# EAGLE board SparkFun RTK Facet - Main (EAGLE 9.6.2)
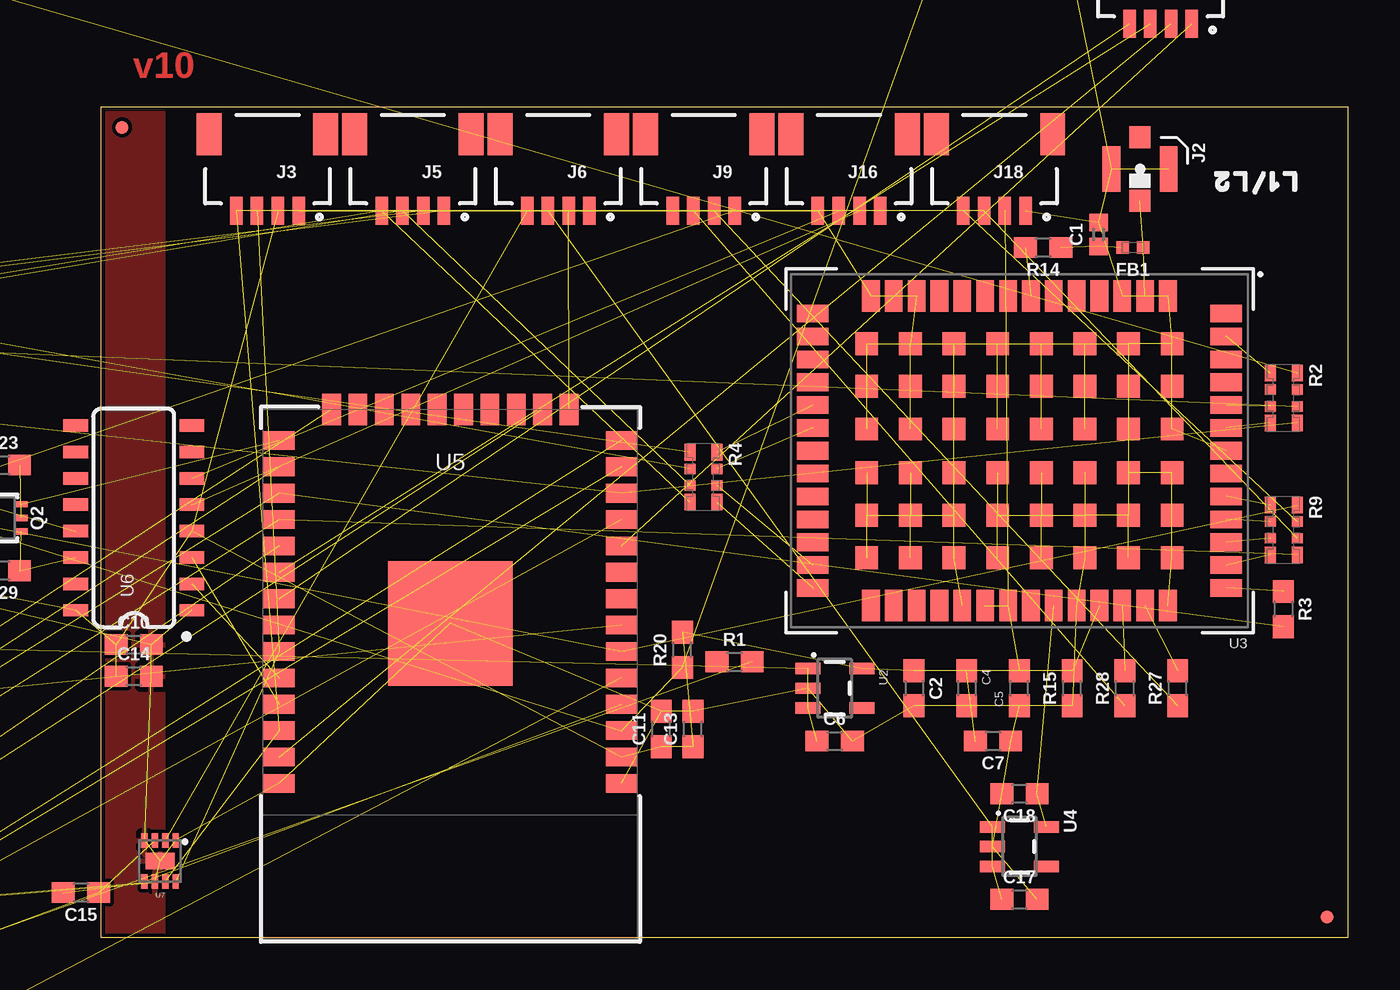
[diagram p0: board, top side]
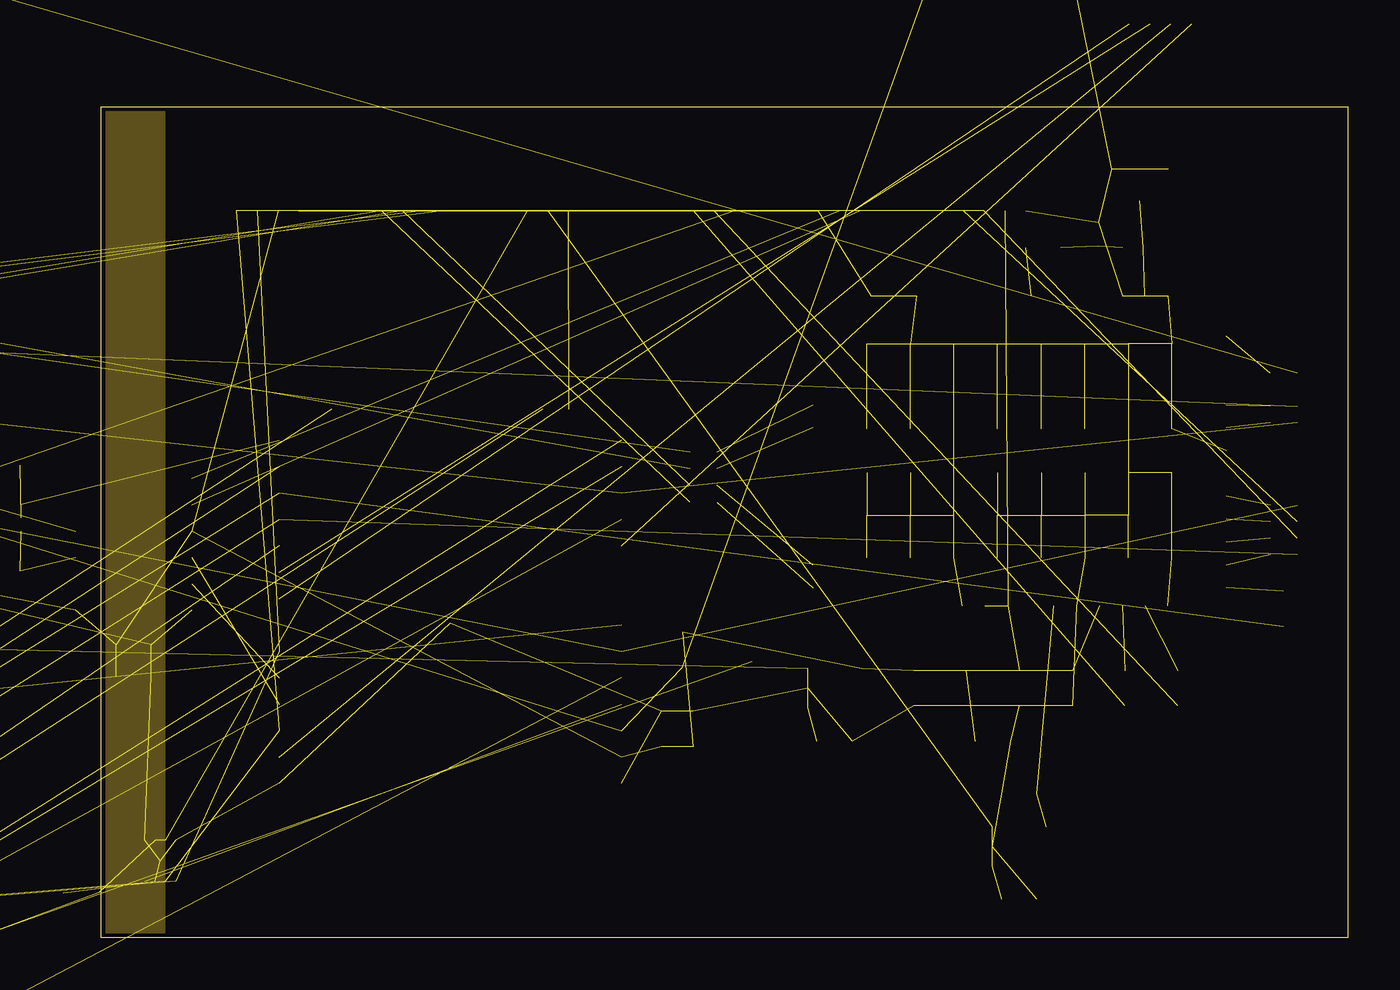
[diagram p1: board, inner layer Horz/GND]
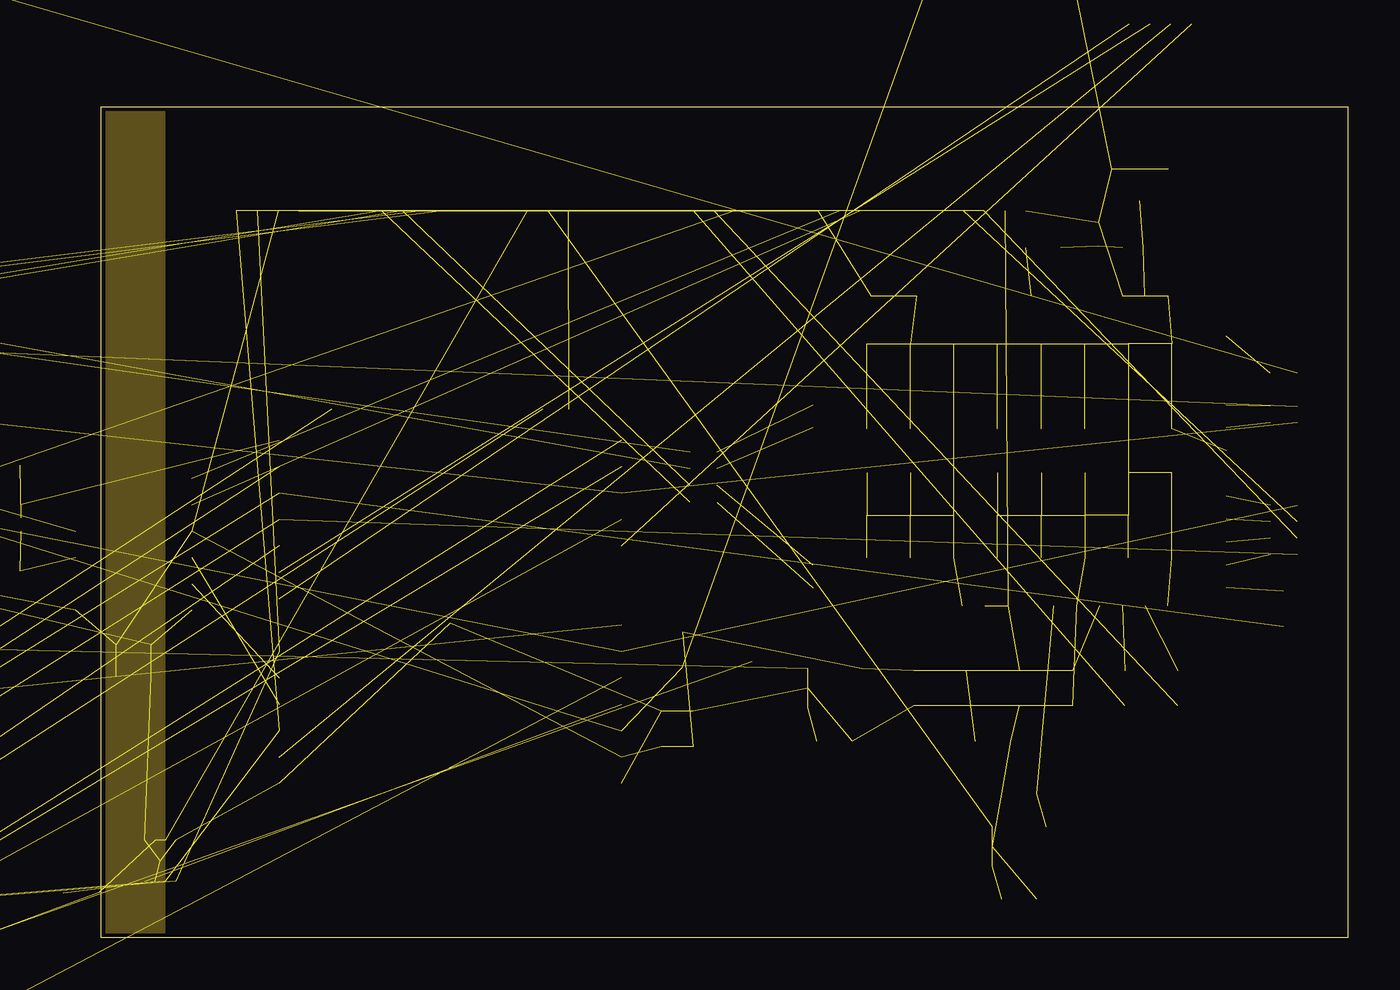
[diagram p2: board, inner layer Vert]
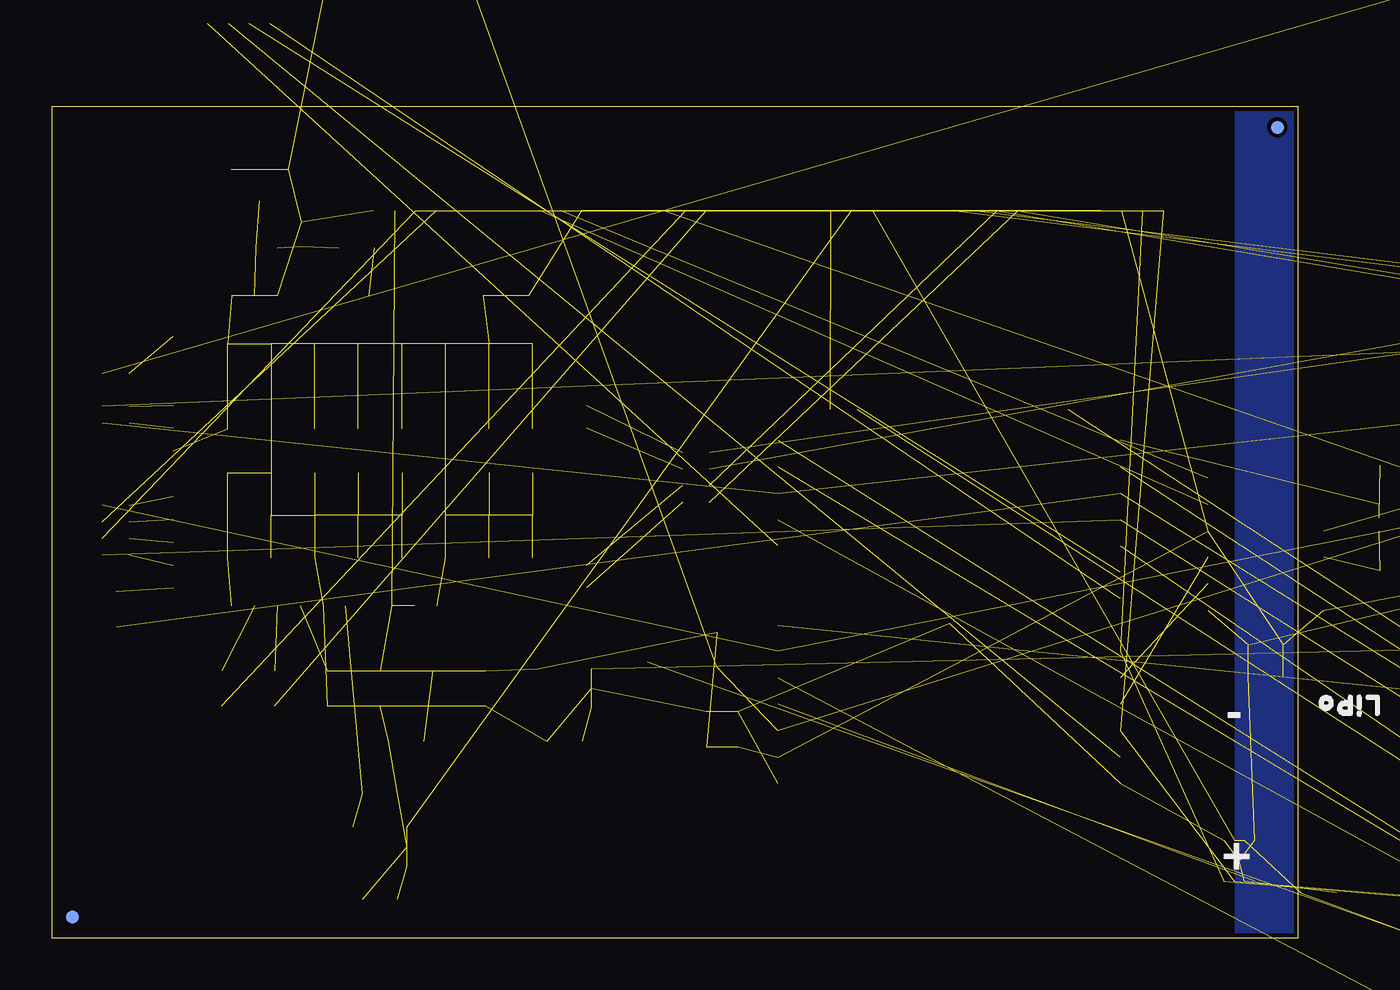
[diagram p3: board, bottom side, seen from below]

Size 60 x 40 mm. Coordinates in mm from the lower left corner, seen from the top.
Outline: 0,40 60,40 60,0 0,0 0,40
Copper layers (1*2*15*16): Top 0.035559375mm / dielectric 0.47751875mm / Horz/GND 0.035559375mm / dielectric 0.47751875mm / Vert 0.035559375mm / dielectric 0.47751875mm / Bottom 0.035559375mm
Design rules "SparkFun-4-layer-TIGHT *": minimum track width 7mil, minimum drill 12mil, track to track 7mil, track to pad 7mil, pad to pad 7mil, via to via 7mil, smd to smd 7mil, copper to edge 7mil, drill to drill 7mil, minimum pad ring 7mil, minimum via ring 7mil, stop-mask expansion 4mil, vias tented up to drill 25mil, thermal gap 10mil
Net classes: 1 power: width 0.305 mm; 2 3.3V: width 0.559 mm; 3 RF: width 0.35 mm, clearance 0.203 mm
tKeepout: area 0,0 to 2,40; area 58,0 to 60,40
bKeepout: area 0,0 to 2,40; area 58,0 to 60,40

## Footprints (pad centres in the part's own frame; a part is rotated, then mirrored left to right if it is on the bottom)
0402 = smd 0.85 x 0.9: 1 -0.58,0; 2 0.58,0
0603 = smd 1.1 x 1: 1 -0.85,0; 2 0.85,0
LED-0603 = smd 1 x 1: A -0.877,0; C 0.877,0
SOD-323 = smd 0.63 x 0.83: A 1.15,0; C -1.15,0
0402-TIGHT = smd 0.6 x 0.6: 1 -0.5,0; 2 0.5,0
1X04_NO_SILK = drill 1.016 pad 1.88: 1 0,0; 2 2.54,0; 3 5.08,0; 4 7.62,0
U.FL = smd 2.2 x 0.85: 1 0,1.375; 2 0,-1.375 | smd 1.05 x 1: FEED 1.525,0; NC -1.525,0
JST04_1MM_RA = smd 0.6 x 1.35: 1 -1.5,0; 2 -0.5,0; 3 0.5,0; 4 1.5,0 | smd 1.2 x 2: NC1 2.8,-3.675; NC2 -2.8,-3.675
JST-2-SMD = smd 1 x 4.6: 1 -1,-3.7; 2 1,-3.7 | smd 1.6 x 3.4: NC1 -3.4,1.5; NC2 3.4,1.5
1X02_NO_SILK = drill 1.016 pad 1.88: 1 0,0; 2 2.54,0
JST-3-SMD = smd 1 x 4.6: 1 2.01,-4.77; 2 0.01,-4.77; 3 -1.99,-4.77 | smd 1.6 x 3.4: NC1 -4.39,0.43; NC2 4.41,0.43
SMT-JUMPER_3_2-NC_TRACE_SILK = smd 0.66 x 1.27: 1 -1.041,0; 2 0,0; 3 1.041,0
FIDUCIAL-MICRO = smd 0.635 x 0.635: 1 0,0
COMBO-JUMPER_2_NC_TRACE = smd 0.635 x 1.27: 1 -0.508,0; 2 0.508,0 | drill 1.016 pad 1.88: 3 -1.27,0; 4 1.27,0
SOT23-3 = smd 0.8 x 0.9: 1 -0.95,-1; 2 0.95,-1; 3 0,1.1
SC70-6 = smd 0.3 x 0.66: 1 -0.65,-0.92; 2 0,-0.92; 3 0.65,-0.92; 4 0.65,0.92; 5 0,0.92; 6 -0.65,0.92
1206_RA = smd 0.8 x 0.55: P1 -1.2,-0.62; P4 1.2,-0.62; P5 1.2,0.68; P8 -1.2,0.68 | smd 0.5 x 0.55: P2 -0.4,-0.62; P3 0.4,-0.62; P6 0.4,0.68; P7 -0.4,0.68
SO16 = smd 0.6 x 1.2: 1 -4.445,-2.8; 2 -3.175,-2.8; 3 -1.905,-2.8; 4 -0.635,-2.8; 5 0.635,-2.8; 6 1.905,-2.8; 7 3.175,-2.8; 8 4.445,-2.8; 9 4.445,2.8; 10 3.175,2.8; 11 1.905,2.8; 12 0.635,2.8; 13 -0.635,2.8; 14 -1.905,2.8; 15 -3.175,2.8; 16 -4.445,2.8
SOT23-5 = smd 0.55 x 1.2: 1 -0.95,-1.3; 2 0,-1.3; 3 0.95,-1.3; 4 0.95,1.3; 5 -0.95,1.3
ZED-F9P = smd 0.85 x 1.52: 1 -7.15,-7.45; 2 -6.05,-7.45; 3 -4.95,-7.45; 4 -3.85,-7.45; 5 -2.75,-7.45; 6 -1.65,-7.45; 7 -0.55,-7.45; 8 0.55,-7.45; 9 1.65,-7.45; 10 2.75,-7.45; 11 3.85,-7.45; 12 4.95,-7.45; 13 6.05,-7.45; 14 7.15,-7.45; 28 7.15,7.45; 29 6.05,7.45; 30 4.95,7.45; 31 3.85,7.45; 32 2.75,7.45; 33 1.65,7.45; 34 0.55,7.45; 35 -0.55,7.45; 36 -1.65,7.45; 37 -2.75,7.45; 38 -3.85,7.45; 39 -4.95,7.45; 40 -6.05,7.45; 41 -7.15,7.45 | smd 1.52 x 0.85: 15 9.95,-6.6; 16 9.95,-5.5; 17 9.95,-4.4; 18 9.95,-3.3; 19 9.95,-2.2; 20 9.95,-1.1; 21 9.95,0; 22 9.95,1.1; 23 9.95,2.2; 24 9.95,3.3; 25 9.95,4.4; 26 9.95,5.5; 27 9.95,6.6; 42 -9.95,6.6; 43 -9.95,5.5; 44 -9.95,4.4; 45 -9.95,3.3; 46 -9.95,2.2; 47 -9.95,1.1; 48 -9.95,0; 49 -9.95,-1.1; 50 -9.95,-2.2; 51 -9.95,-3.3; 52 -9.95,-4.4; 53 -9.95,-5.5; 54 -9.95,-6.6 | smd 1.1 x 1.1: 55 -1.05,-1.05; 56 -3.15,-1.05; 57 -5.25,-1.05; 58 -7.35,-1.05; 59 -1.05,-3.1; 60 -3.15,-3.1; 61 -5.25,-3.1; 62 -7.35,-3.1; 63 -1.05,-5.15; 64 -3.15,-5.15; 65 -5.25,-5.15; 66 -7.35,-5.15; 67 -1.05,5.15; 68 -3.15,5.15; 69 -5.25,5.15; 70 -7.35,5.15; 71 -1.05,3.1; 72 -3.15,3.1; 73 -5.25,3.1; 74 -7.35,3.1; 75 -1.05,1.05; 76 -3.15,1.05; 77 -5.25,1.05; 78 -7.35,1.05; 79 1.05,1.05; 80 3.15,1.05; 81 5.25,1.05; 82 7.35,1.05; 83 1.05,3.1; 84 3.15,3.1; 85 5.25,3.1; 86 7.35,3.1; 87 1.05,5.15; 88 3.15,5.15; 89 5.25,5.15; 90 7.35,5.15; 91 1.05,-5.15; 92 3.15,-5.15; 93 5.25,-5.15; 94 7.35,-5.15; 95 1.05,-3.1; 96 3.15,-3.1; 97 5.25,-3.1; 98 7.35,-3.1; 99 1.05,-1.05; 100 3.15,-1.05; 101 5.25,-1.05; 102 7.35,-1.05
ESP-WROOM-32-NARROW = smd 0.9 x 1.5: 1 6.43,8.238; 2 5.16,8.238; 3 3.89,8.238; 4 2.62,8.238; 5 1.35,8.238; 6 0.08,8.238; 7 -1.19,8.238; 8 -2.46,8.238; 9 -3.73,8.238; 10 -5,8.238; 11 -6.27,8.238; 12 -7.54,8.238; 13 -8.81,8.238; 14 -10.08,8.238; 25 -10.08,-8.238; 26 -8.81,-8.238; 27 -7.54,-8.238; 28 -6.27,-8.238; 29 -5,-8.238; 30 -3.73,-8.238; 31 -2.46,-8.238; 32 -1.19,-8.238; 33 0.08,-8.238; 34 1.35,-8.238; 35 2.62,-8.238; 36 3.89,-8.238; 37 5.16,-8.238; 38 6.43,-8.238 | smd 1.5 x 0.9: 15 -11.57,5.715; 16 -11.57,4.445; 17 -11.57,3.175; 18 -11.57,1.905; 19 -11.57,0.635; 20 -11.57,-0.635; 21 -11.57,-1.905; 22 -11.57,-3.175; 23 -11.57,-4.445; 24 -11.57,-5.715 | smd 6 x 6: GND -1.27,0
SO016 = smd 0.6 x 1.2: 1 -4.445,-2.8; 2 -3.175,-2.8; 3 -1.905,-2.8; 4 -0.635,-2.8; 5 0.635,-2.8; 6 1.905,-2.8; 7 3.175,-2.8; 8 4.445,-2.8; 9 4.445,2.8; 10 3.175,2.8; 11 1.905,2.8; 12 0.635,2.8; 13 -0.635,2.8; 14 -1.905,2.8; 15 -3.175,2.8; 16 -4.445,2.8
DFN-8 = smd 0.3 x 0.7: 1 -0.75,-0.99; 2 -0.25,-0.99; 3 0.25,-0.99; 4 0.75,-0.99; 5 0.75,0.99; 6 0.25,0.99; 7 -0.25,0.99; 8 -0.75,0.99 | smd 1.38 x 0.8: 9 0,0
DFN-10 = smd 0.8 x 0.35: 1 -1.45,1; 2 -1.45,0.5; 3 -1.45,0; 4 -1.45,-0.5; 5 -1.45,-1; 6 1.45,-1; 7 1.45,-0.5; 8 1.45,0; 9 1.45,0.5; 10 1.45,1 | smd 1.7 x 2.5: 11 0,0

## Placement (x,y rotation side)
C1  47pF  [0402]  48.01,33.85 90 top
C2  1.0uF  [0603]  39.12,12.01 270 top
C3  4.7uF  [0603]  -119.38,-49.53 0 top  (outside the outline)
C4  1.0uF  [0603]  41.66,12.01 270 top
C5  0.1uF  [0603]  44.2,12.01 90 top
C6  1.0uF  [0603]  35.31,9.47 0 top
C7  0.1uF  [0603]  42.93,9.47 180 top
C10  10uF  [0603]  1.56,14.11 0 top
C11  0.1uF  [0603]  26.96,10.05 90 top
C12  0.1uF  [0603]  44.5,58.14 270 bottom  (outside the outline)
C13  0.1uF  [0603]  28.48,10.05 90 top
C14  10uF  [0603]  1.56,12.59 0 top
C15  0.1uF  [0603]  -0.98,2.18 180 top
C16  4.7uF  [0603]  -115.57,-49.53 0 top  (outside the outline)
C17  1.0uF  [0603]  44.2,1.85 0 top
C18  1.0uF  [0603]  44.2,6.93 180 top
D1  Yellow  [LED-0603]  -70.61,62.87 0 top  (outside the outline)
D2  3A/10V/280mV  [SOD-323]  -111.76,-13.97 0 top  (outside the outline)
D3  3A/10V/280mV  [SOD-323]  -125.73,-49.53 0 top  (outside the outline)
FB1  2.66Ω  [0402-TIGHT]  49.66,33.22 180 top
FRAME2  FRAME-LEDGER  [CREATIVE_COMMONS]  82.55,6.35 0 top  (outside the outline)
J1  [1X04_NO_SILK]  -57.15,33.02 90 top  (outside the outline)
J2  U.FL  [U.FL]  50,37 270 top
J3  Qwiic  [JST04_1MM_RA]  8,35 180 top
J4  Qwiic Right Angle  [JST04_1MM_RA]  -81.2,-4.3 0 bottom  (outside the outline)
J5  [JST04_1MM_RA]  15,35 180 top
J6  [JST04_1MM_RA]  22,35 180 top
J7  [JST-2-SMD]  -124.46,-31.75 0 top  (outside the outline)
J8  [1X04_NO_SILK]  -127,-68.58 0 top  (outside the outline)
J9  [JST04_1MM_RA]  29,35 180 top
J11  [1X04_NO_SILK]  -95.25,16.14 180 top  (outside the outline)
J12  [1X04_NO_SILK]  -49.53,26.4 180 top  (outside the outline)
J13  [1X04_NO_SILK]  -91.44,29.21 90 top  (outside the outline)
J14  [1X02_NO_SILK]  60.3,60.99 270 top  (outside the outline)
J16  [JST04_1MM_RA]  36,35 180 top
J17  3-PIN SMD  [JST-3-SMD]  -113.03,-10.16 0 top  (outside the outline)
J18  QWIIC_RIGHT_ANGLE  [JST04_1MM_RA]  43,35 180 top
J19  [JST04_1MM_RA]  51,44 180 top  (outside the outline)
J20  [1X02_NO_SILK]  -115.57,-40.64 0 top  (outside the outline)
JP7  JUMPER-SMT_3_2-NC_TRACE_SILK  [SMT-JUMPER_3_2-NC_TRACE_SILK]  -120.65,-72.39 0 top  (outside the outline)
JP21  FIDUCIALUFIDUCIAL  [FIDUCIAL-MICRO]  59,1 0 top
JP61  FIDUCIALUFIDUCIAL  [FIDUCIAL-MICRO]  1,39 0 top
JP71  FIDUCIALUFIDUCIAL  [FIDUCIAL-MICRO]  59,1 0 bottom
JP81  FIDUCIALUFIDUCIAL  [FIDUCIAL-MICRO]  1,39 0 bottom
LOGO1  OSHW-LOGOMINI  [OSHW-LOGO-MINI]  -107.95,83.82 0 bottom  (outside the outline)
LOGO2  SFE_LOGO_NAME_FLAME.1_INCH  [SFE_LOGO_NAME_FLAME_.1]  -123.8,65.02 0 top  (outside the outline)
LOGO3  SFE_LOGO_NAME_FLAME.1_INCH  [SFE_LOGO_NAME_FLAME_.1]  25,87.69 0 top  (outside the outline)
MEAS2  [COMBO-JUMPER_2_NC_TRACE]  -127,-57.15 0 top  (outside the outline)
Q1  600mA/40V  [SOT23-3]  -111.76,0 0 top  (outside the outline)
Q2  MBT3904DW1T1  [SC70-6]  -4.79,20.21 270 top  (outside the outline)
R1  1k  [0603]  30.48,13.28 0 top
R2  33  [1206_RA]  56.9,25.98 270 top
R3  33  [0603]  56.9,15.82 270 top
R4  33  [1206_RA]  28.96,22.17 270 top
R5  10k  [0603]  -111.76,-5.08 0 top  (outside the outline)
R6  1k  [0603]  -127,-53.34 0 top  (outside the outline)
R7  2.2k  [0603]  -127,-76.2 0 top  (outside the outline)
R8  0  [0603]  -123.19,-53.34 0 top  (outside the outline)
R9  33  [1206_RA]  56.9,19.63 270 top
R10  10k  [0603]  -119.38,-53.34 0 top  (outside the outline)
R11  330  [0603]  -70.61,64.14 0 top  (outside the outline)
R12  2.2k  [0603]  -123.19,-76.2 0 top  (outside the outline)
R14  10  [0603]  45.34,33.22 180 top
R15  100k  [0603]  46.74,12.01 90 top
R18  1k  [0603]  -113.03,-17.78 0 top  (outside the outline)
R20  10k  [0603]  27.98,13.86 90 top
R23  10k  [0603]  -4.79,22.75 0 top  (outside the outline)
R27  27  [0603]  51.82,12.01 90 top
R28  27  [0603]  49.28,12.01 90 top
R29  10k  [0603]  -4.79,17.67 180 top  (outside the outline)
R30  150k  [0603]  -115.57,-53.34 0 top  (outside the outline)
U1  74HC4052D  [SO16]  -121.92,-62.23 0 top  (outside the outline)
U2  3.3V  [SOT23-5]  35.31,12.01 270 top
U3  U-BLOX_ZED-F9P  [ZED-F9P]  44.2,23.44 180 top
U4  3.3V  [SOT23-5]  44.2,4.39 270 top
U5  ESP-WROOM-32NARROW  [ESP-WROOM-32-NARROW]  16.8,13.86 270 top
U6  CH340C  [SO016]  1.56,20.21 90 top
U7  MAX17048  [DFN-8]  2.83,3.7 180 top
U10  MCP73833  [DFN-10]  -125.73,-43.18 0 top  (outside the outline)
U$1  [#GND#0]  -56.52,33.02 0 top  (outside the outline)
U$2  SPECIAL_INSTRUCTIONS-ORDERING  [ORDERING_INSTRUCTIONS]  63.5,81.28 0 top  (outside the outline)
U$5  [#3V3#0]  -57.15,26.81 90 top  (outside the outline)
U$6  [ANTENNA0]  -91.44,19.67 0 top  (outside the outline)
U$10  [#RTK#1]  -56.64,38.1 0 top  (outside the outline)
U$11  [#PPS#0]  -91.95,29.21 0 bottom  (outside the outline)
U$14  [#RX#2]  -107.95,40.13 270 bottom  (outside the outline)
U$16  [ZED0]  -106.17,39.75 90 bottom  (outside the outline)
U$17  [##SAFE##5]  -91.95,31.75 0 bottom  (outside the outline)
U$18  [ACTIVE0]  -90.81,21.07 0 top  (outside the outline)
U$19  [L1#L21]  58.3,36.41 180 top
U$23  [#3#5#5V#0]  -102.87,16.65 90 top  (outside the outline)
U$27  [LIPO0]  -4.66,11.19 180 bottom  (outside the outline)
U$28  [##RST##4]  -91.95,34.29 0 bottom  (outside the outline)
U$30  [QWIIC_4MM]  -81.2,-2.4 0 bottom  (outside the outline)
U$32  [#FENCE#3]  -56.64,35.56 0 top  (outside the outline)
U$33  [#INT#0]  -91.95,36.83 0 bottom  (outside the outline)
U$37  [#3V3#0]  -56.64,40.64 0 top  (outside the outline)
U$38  [#GND#0]  -95.25,16.65 90 top  (outside the outline)
U$39  [#RX2#2]  -97.79,16.65 90 top  (outside the outline)
U$40  [#TX2#1]  -100.33,16.65 90 top  (outside the outline)
U$41  [BLUETOOTH2]  -103.76,23.5 90 top  (outside the outline)
U$51  [BROADCAST3]  -102.23,23.5 90 top  (outside the outline)
U$52  [NMEA1]  -100.58,32.26 0 top  (outside the outline)
U$53  [RTCM0]  -100.58,23.5 0 top  (outside the outline)
U$56  [POWER0]  -53.31,68.88 0 top  (outside the outline)
U$57  [SWITCH1]  -50.13,67.61 0 top  (outside the outline)
U$58  [BLUEOOTH3]  -101.85,45.47 0 top  (outside the outline)
U$59  [CNTR1]  -98.42,36.07 0 top  (outside the outline)
U$60  [#ESP_RST#0]  59.74,60.93 0 bottom  (outside the outline)
U$61  [EXT0]  -101.98,36.07 0 top  (outside the outline)
U$62  [NMEA2]  -103.5,39.75 90 top  (outside the outline)
U$63  [SERIAL10]  -105.16,39.24 90 top  (outside the outline)
U$64  [CONNECTION1]  -102.11,36.2 90 top  (outside the outline)
U$65  [#TX1#1]  -54.61,26.81 90 top  (outside the outline)
U$68  [#RX1#2]  -52.07,26.81 90 top  (outside the outline)
U$72  [#TX#1]  -107.95,47.24 270 bottom  (outside the outline)
U$73  [#DUAL#0]  -102.87,46.86 270 bottom  (outside the outline)
U$82  [#GND#0]  -49.53,26.81 90 top  (outside the outline)
U$84  [#GND#1]  59.74,58.39 0 bottom  (outside the outline)

## Library data of the parts
C1 = SparkFun-Capacitors; PROD_ID: CAP-15063
C2 C4 C6 C17 C18 = SparkFun-Capacitors; PROD_ID: CAP-13930
C3 C16 = SparkFun-Capacitors; PROD_ID: CAP-14106
C5 C7 = SparkFun-Capacitors; PROD_ID: CAP-08604
C10 C14 = SparkFun-Capacitors; PROD_ID: CAP-11015
C11-C13 C15 = SparkFun-Capacitors; PROD_ID: CAP-00810
D1 = SparkFun-LED; PROD_ID: DIO-09003
D2 D3 = SparkFun-DiscreteSemi; PROD_ID: DIO-14072
FB1 = SparkFun-Coils; PROD_ID: NDUC-15072
FRAME2 JP21 JP61 JP71 JP81 LOGO1-LOGO3 U$2 U$30 = SparkFun-Aesthetics
J1 J8 J11-J14 J20 = SparkFun-Connectors
J2 = SparkFun-Connectors; PROD_ID: CONN-09193; SF_ID: WRL-09144
J3 J4 J18 = SparkFun-Connectors; PROD_ID: CONN-13694
J5 J6 J9 J16 J19 = SparkFun-Connectors; PROD_ID: CONN-10310; SF_ID: PRT-10208
J7 = SparkFun-Connectors; PROD_ID: CONN-11443; SF_ID: PRT-08612
J17 = SparkFun-Connectors; PROD_ID: CONN-12591
JP7 MEAS2 = SparkFun-Jumpers
Q1 = SparkFun-DiscreteSemi; PROD_ID: TRANS-08049
Q2 = SparkFun-DiscreteSemi; PROD_ID: TRANS-13337
R1 R6 R18 = SparkFun-Resistors; PROD_ID: RES-07856
R2 R4 R9 = SparkFun-Resistors; PROD_ID: RES-15081
R3 = SparkFun-Resistors; PROD_ID: RES-08270
R5 R20 R23 R29 = SparkFun-Resistors; PROD_ID: RES-00824
R7 R12 = SparkFun-Resistors; PROD_ID: RES-08272
R8 = SparkFun-Resistors; PROD_ID: RES-08609
R10 = SparkFun-Resistors; PROD_ID: RES-13608
R11 = SparkFun-Resistors; PROD_ID: RES-00818
R14 = SparkFun-Resistors; PROD_ID: RES-12581
R15 = SparkFun-Resistors; PROD_ID: RES-07828
R27 R28 = SparkFun-Resistors; PROD_ID: RES-09334
R30 = SparkFun-Resistors; PROD_ID: RES-09117
U1 = SparkFun-IC-Logic; PROD_ID: IC-13103
U2 U4 = SparkFun-IC-Power; PROD_ID: VREG-12457
U3 = SparkFun-GPS; PROD_ID: IC-14209
U5 = SparkFun-RF; PROD_ID: IC-13849
U6 = SparkFun-IC-Comms; PROD_ID: IC-14038
U7 = SparkFun-IC-Power; PROD_ID: IC-12551
U10 = SparkFun-IC-Power; PROD_ID: IC-14369
U$1 U$5 U$6 U$10 U$11 U$14 U$16-U$19 U$23 U$27 U$28 U$32 U$33 U$37-U$41 U$51-U$53 U$56-U$65 U$68 U$72 U$73 U$82 U$84 = output

## Nets
3.3V [power]: C2.1 C4.1 C5.2 C7.2 C10.1 C11.1 C13.1 C14.1 J1.4 J3.2 J4.2 J12.4 J18.2 JP7.2 R15.2 R20.2 U1.16 U2.5 U3.33 U3.34 U3.38 U5.2 U6.4 U6.16
5V [power]: C6.1 D2.C J11.4 J17.1 U2.1 U2.3
ANT_VCC: C1.1 FB1.2 R14.1
CHG_LED: R1.2 U10.3
CHG_THERM1: R8.2 R10.2 R30.2
ESP32_!DTR: Q2.1 R23.1 U6.13
ESP32_!RTS: Q2.4 R29.1 U6.14
ESP32_EN: C12.1 J14.1 Q2.3 R20.1 U5.3
ESP32_RXI: U5.34 U6.2
ESP32_TXO: U5.35 U6.3
ESP_0/BOOT: Q2.6 U5.25
ESP_2/MUX_A: U1.10 U5.24
ESP_4/MUX_B: U1.9 U5.26
ESP_5: J8.4 U5.29
ESP_12: J8.3 U5.14
ESP_13: J8.2 U5.16
ESP_14: J8.1 U5.13
ESP_15: U5.23
ESP_16/ZED-TX01: R3.2 U1.12 U5.27
ESP_17/ZED-RXI1: R9.P5 U1.1 U5.28
ESP_18/SD_SCK: J19.3 U5.30
ESP_19/SD_CIPO: J19.4 U5.31
ESP_21/SDA: J3.3 J4.3 J18.3 R7.1 R9.P6 U1.2 U5.33 U7.8
ESP_22/SCL: J3.4 J4.4 J18.4 R9.P7 R12.1 U1.15 U5.36 U7.7
ESP_23/SD_COPI: J19.2 U5.37
ESP_25/SD_!CS!: J19.1 U5.10
ESP_26/DAC2: U1.11 U5.11
ESP_27/ZED_!RESET!: J13.3 R2.P5 U1.5 U5.12
ESP_32/PWR_LVL_RED: U5.8
ESP_33/PWR_LVL_GRN: U5.9
ESP_36/BATT_ALRT: U5.4 U7.5
ESP_D_N: J16.3 U6.6
ESP_D_P: J16.2 U6.5
ESP_I34/ZED_TX_READY: J13.4 R9.P8 U5.6
ESP_I35/SWITCH_BASE_SELECT: Q1.3 U5.7
ESP_I39/ADC39: U1.4 U5.5
EXTERNAL_SERIAL1_RXI: J5.1 J12.2 U1.3
EXTERNAL_SERIAL1_TXO: J5.2 J12.3 U1.13
FENCE_LV: R4.P8 U3.19
GND: C1.2 C2.2 C3.2 C4.2 C5.1 C6.2 C7.1 C10.2 C11.2 C12.2 C13.2 C14.2 C15.2 C16.2 C17.2 C18.2 D1.C J1.1 J2.1 J2.2 J3.1 J4.1 J6.1 J6.2 J7.1 J9.4 J11.1 J12.1 J14.2 J16.4 J18.1 J20.2 Q1.2 R5.1 R6.1 R10.1 R15.1 R30.1 U1.6 U1.7 U1.8 U2.2 U3.1 U3.3 U3.12 U3.14 U3.32 U3.37 U3.41 U3.48 U3.55 U3.56 U3.57 U3.58 U3.59 U3.60 U3.61 U3.62 U3.63 U3.64 U3.65 U3.66 U3.67 U3.68 U3.69 U3.70 U3.71 U3.72 U3.73 U3.74 U3.75 U3.76 U3.77 U3.78 U3.79 U3.80 U3.81 U3.82 U3.83 U3.84 U3.85 U3.86 U3.87 U3.88 U3.89 U3.90 U3.91 U3.92 U3.93 U3.94 U3.95 U3.96 U3.97 U3.98 U3.99 U3.100 U3.101 U3.102 U4.2 U5.1 U5.15 U5.38 U5.GND U6.1 U7.1 U7.4 U7.6 U7.9 U10.5 U10.11
GPS_ANT1 [RF]: FB1.1 J2.FEED U3.2
LIPO_RAW: J7.2 MEAS2.1 MEAS2.3
N$1: R8.1 U10.8
N$2: D1.A R11.1
N$3: JP7.3 R7.2
N$4: JP7.1 R12.2
N$8: Q1.1 R5.2 R18.2
N$11: R27.2 U3.40
N$12: R28.2 U3.39
N$13: R14.2 U3.7
N$15: D2.A J17.3 R18.1
N$16: R2.P4 U3.49
N$17: R1.1
N$18: R2.P3 U3.50
N$22: R9.P1 U3.46
N$24: Q2.5 R23.2
N$25: Q2.2 R29.2
PPS: R2.P1 U3.53
PROG1: R6.2 U10.6
RTK_LV: R4.P7 U3.20
RX2_LV: R4.P6 U3.26
RXLV: R9.P4 U3.43
SCL_LV: R9.P2 U3.45
SDA_LV: R9.P3 U3.44
TX2_LV: R4.P5 U3.27
TXLV: R3.1 U3.42
UBX_D_N: J9.3 R28.1
UBX_D_P: J9.2 R27.1
V_BATT [power]: C3.1 C15.1 C17.1 D3.A J6.3 J6.4 J20.1 MEAS2.2 MEAS2.4 U4.1 U4.3 U7.2 U7.3 U10.9 U10.10
VIN [power]: C16.1 D3.C J9.1 J16.1 J17.2 U10.1 U10.2
ZED-RXI2: J5.3 J11.2 R4.P3
ZED-TXO2: J5.4 J11.3 R4.P4
ZED_!SAFE!: J13.2 R2.P6
ZED_BACKUP: C18.1 U3.36 U4.5
ZED_FENCE_STAT: J1.2 R4.P1
ZED_PPS_STAT: J13.1 R2.P8 R11.2 U1.14
ZED_RTK_STAT: J1.3 R4.P2

## Tracks (layer width: path | path; a pad name or v marks a point on that pad's centre or on a via)
3.3V  (23 unrouted)
5V  (5 unrouted)
ANT_VCC  (2 unrouted)
CHG_LED  (1 unrouted)
CHG_THERM1  (2 unrouted)
ESP32_!DTR  (2 unrouted)
ESP32_!RTS  (2 unrouted)
ESP32_EN  (4 unrouted)
ESP32_RXI  (1 unrouted)
ESP32_TXO  (1 unrouted)
ESP_0/BOOT  (1 unrouted)
ESP_2/MUX_A  (1 unrouted)
ESP_4/MUX_B  (1 unrouted)
ESP_5  (1 unrouted)
ESP_12  (1 unrouted)
ESP_13  (1 unrouted)
ESP_14  (1 unrouted)
ESP_16/ZED-TX01  (2 unrouted)
ESP_17/ZED-RXI1  (2 unrouted)
ESP_18/SD_SCK  (1 unrouted)
ESP_19/SD_CIPO  (1 unrouted)
ESP_21/SDA  (7 unrouted)
ESP_22/SCL  (7 unrouted)
ESP_23/SD_COPI  (1 unrouted)
ESP_25/SD_!CS!  (1 unrouted)
ESP_26/DAC2  (1 unrouted)
ESP_27/ZED_!RESET!  (3 unrouted)
ESP_36/BATT_ALRT  (1 unrouted)
ESP_D_N  (1 unrouted)
ESP_D_P  (1 unrouted)
ESP_I34/ZED_TX_READY  (2 unrouted)
ESP_I35/SWITCH_BASE_SELECT  (1 unrouted)
ESP_I39/ADC39  (1 unrouted)
EXTERNAL_SERIAL1_RXI  (2 unrouted)
EXTERNAL_SERIAL1_TXO  (2 unrouted)
FENCE_LV  (1 unrouted)
GND  (109 unrouted)
  pour Top (isolate 0.152, rank 4): 0,40 3,40 3,0 0,0
  pour Bottom (isolate 0.152, rank 4): 0,40 3,40 3,0 0,0
  pour Horz/GND (isolate 0.152, rank 4): 0,40 3,40 3,0 0,0
  pour Vert (isolate 0.152, rank 4): 0,40 3,40 3,0 0,0
GPS_ANT1  (2 unrouted)
LIPO_RAW  (2 unrouted)
N$1  (1 unrouted)
N$2  (1 unrouted)
N$3  (1 unrouted)
N$4  (1 unrouted)
N$8  (2 unrouted)
N$11  (1 unrouted)
N$12  (1 unrouted)
N$13  (1 unrouted)
N$15  (2 unrouted)
N$16  (1 unrouted)
N$18  (1 unrouted)
N$22  (1 unrouted)
N$24  (1 unrouted)
N$25  (1 unrouted)
PPS  (1 unrouted)
PROG1  (1 unrouted)
RTK_LV  (1 unrouted)
RX2_LV  (1 unrouted)
RXLV  (1 unrouted)
SCL_LV  (1 unrouted)
SDA_LV  (1 unrouted)
TX2_LV  (1 unrouted)
TXLV  (1 unrouted)
UBX_D_N  (1 unrouted)
UBX_D_P  (1 unrouted)
V_BATT  (14 unrouted)
VIN  (6 unrouted)
ZED-RXI2  (2 unrouted)
ZED-TXO2  (2 unrouted)
ZED_!SAFE!  (1 unrouted)
ZED_BACKUP  (2 unrouted)
ZED_FENCE_STAT  (1 unrouted)
ZED_PPS_STAT  (3 unrouted)
ZED_RTK_STAT  (1 unrouted)

## Text on the board
Top: v10
bPlace: - | +
tDocu: Board thickness is 1.6mm | 4 Layer Board | No clean process